# Altium PCB Test.PcbDoc
Units mm, origin at the board's own origin, x right, y up, seen from the top; angles counter-clockwise.
Board outline 45.21 x 46.61 mm, 2 copper layers (Top Layer, Bottom Layer); 35 components, 34 nets, 177 pads, 71 vias.
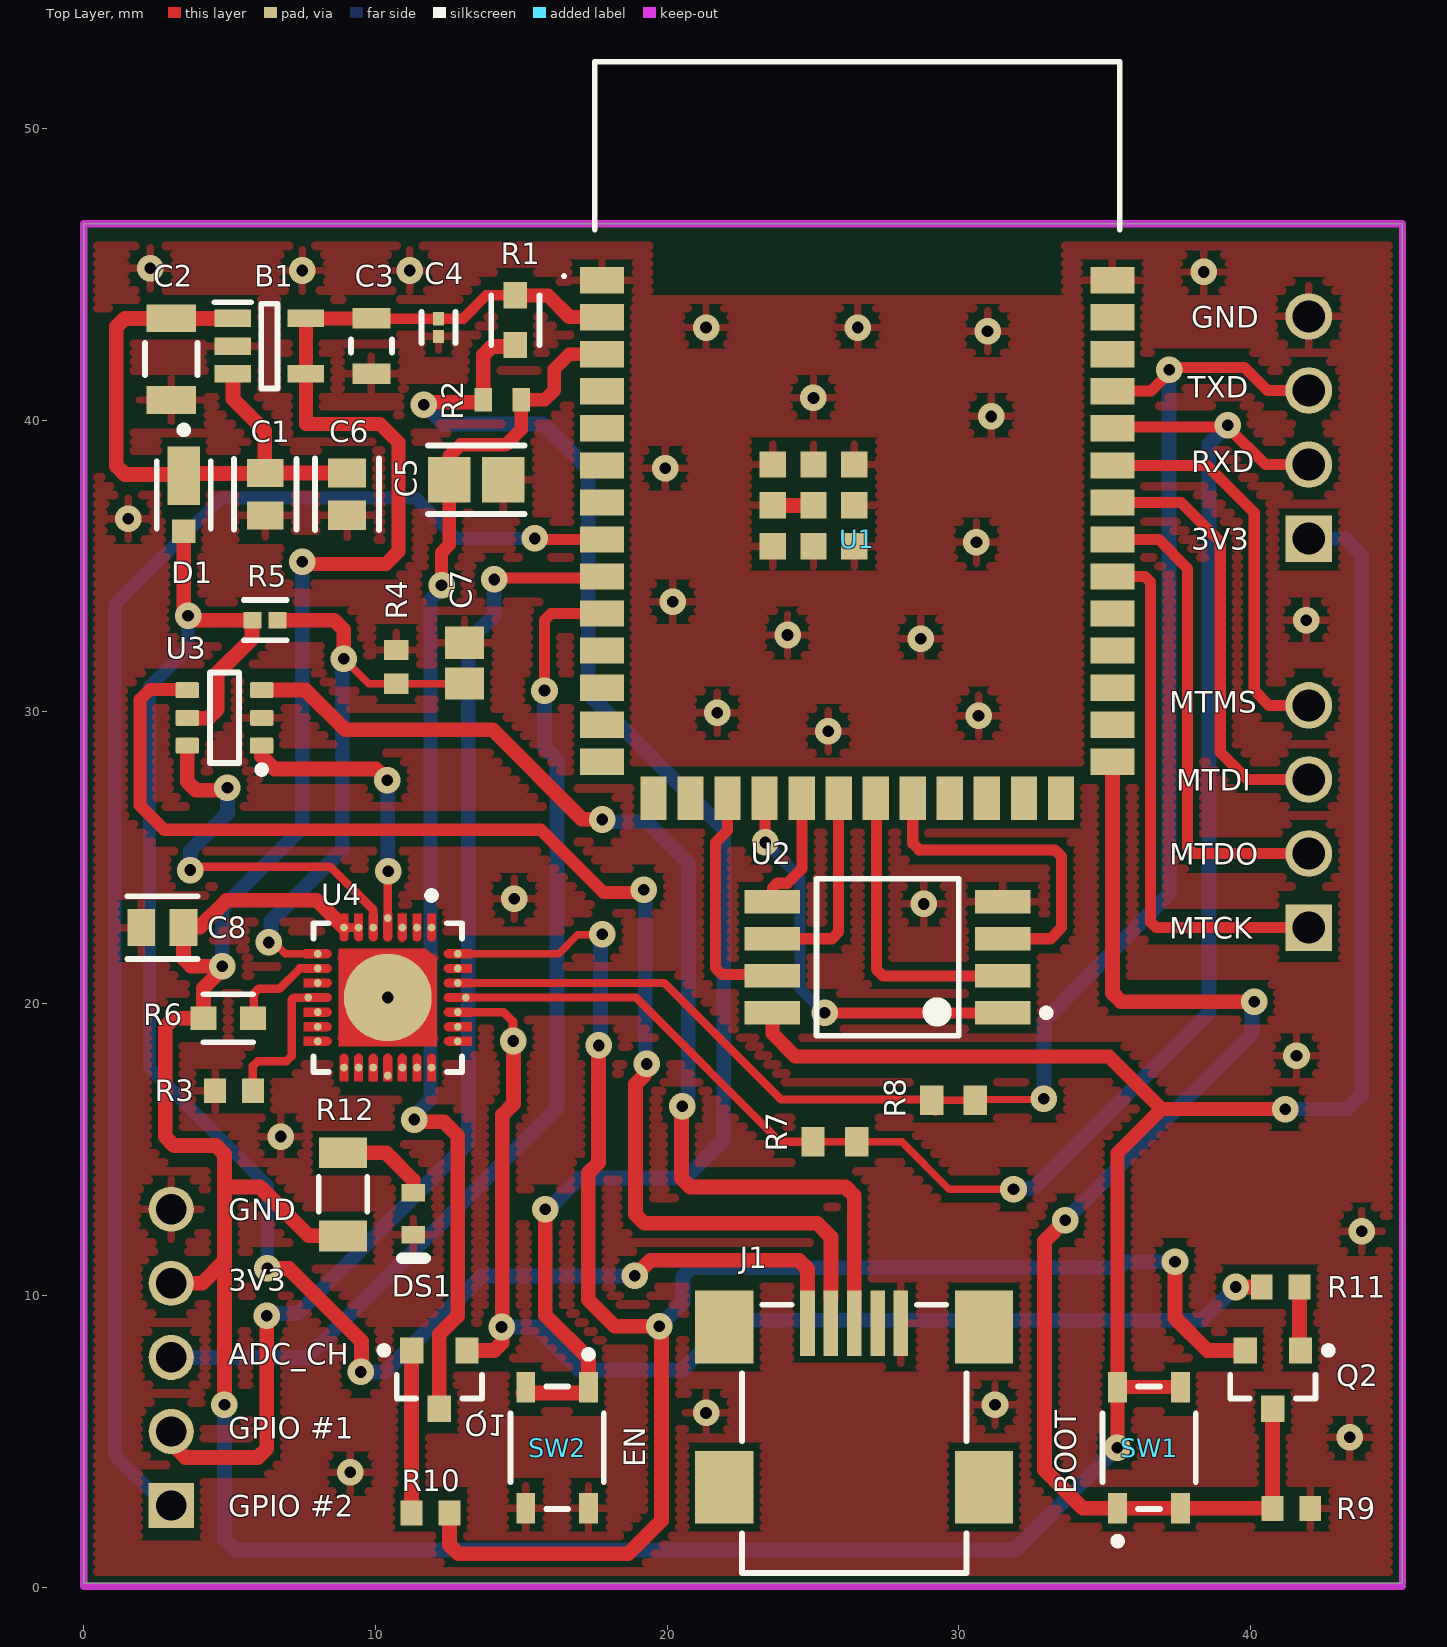
[diagram p0: Top Layer view]
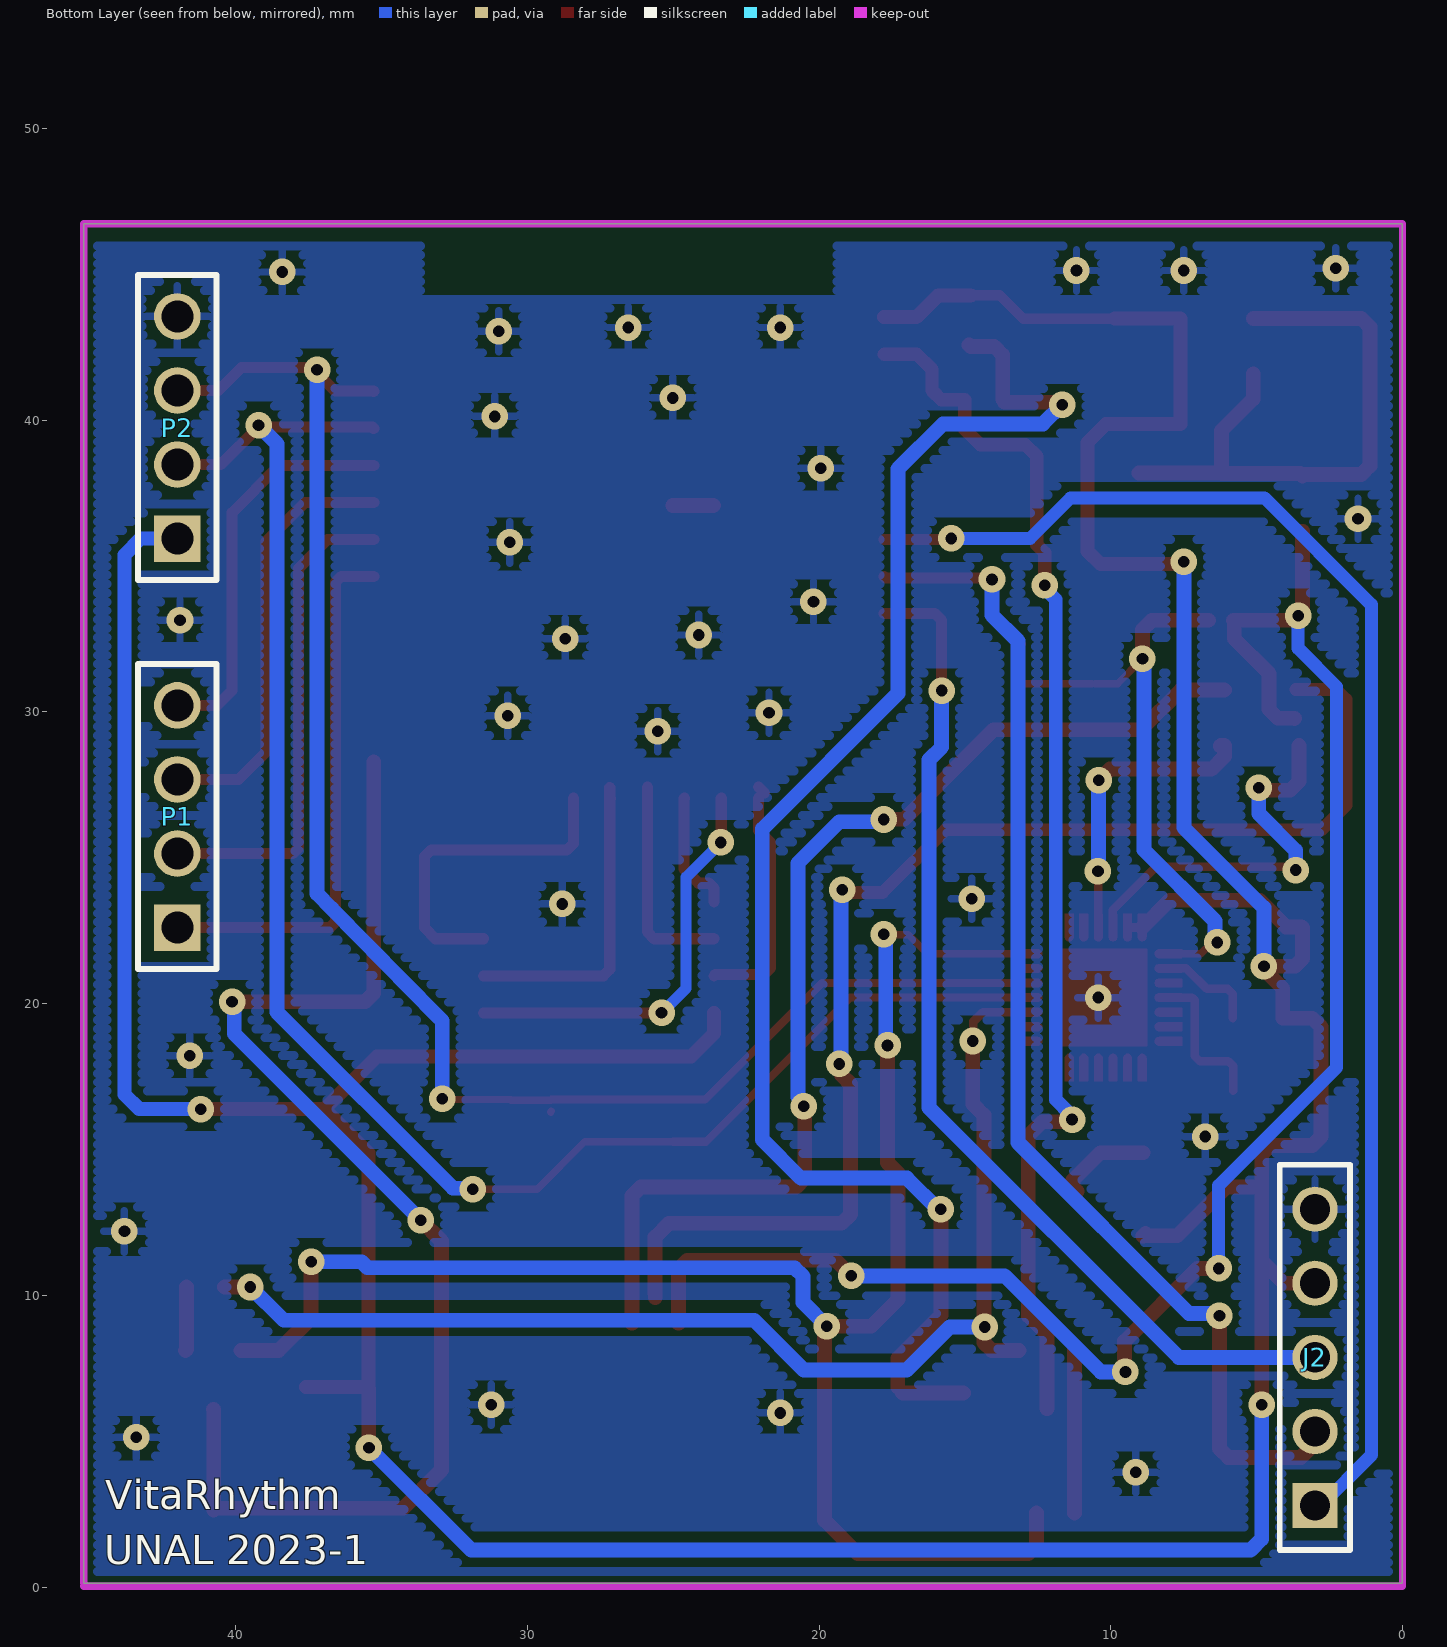
[diagram p1: Bottom Layer view, seen from below]
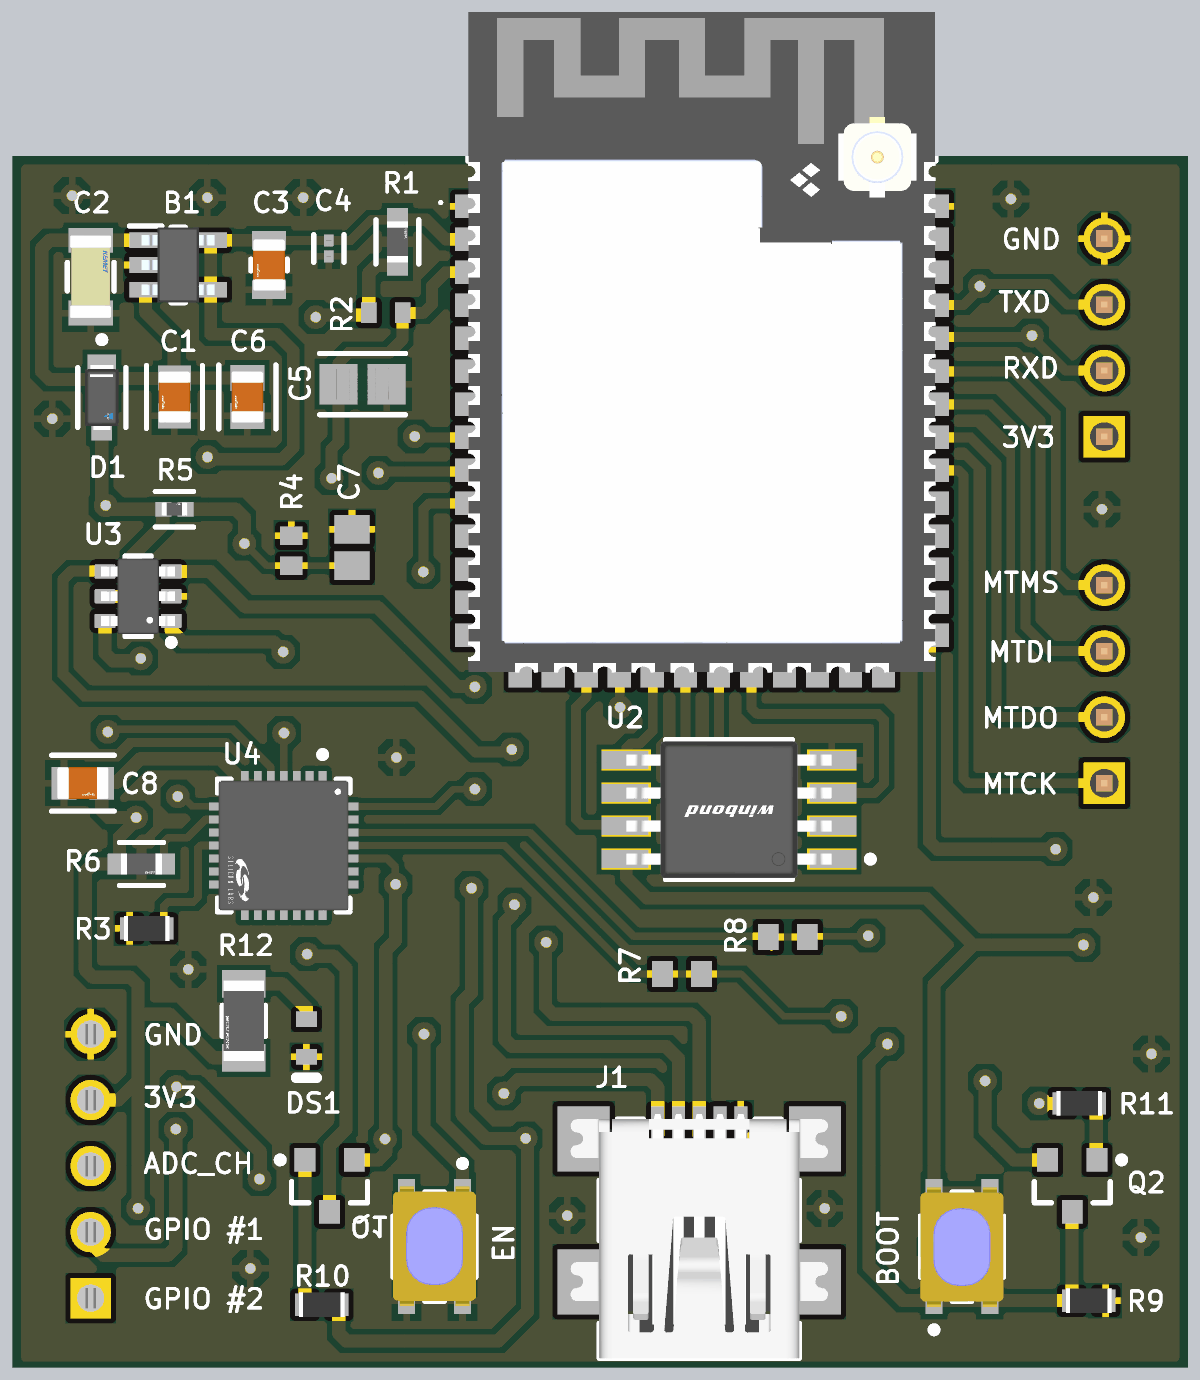
[diagram p2: 3D render of the assembled board from above, using the file's embedded part models]
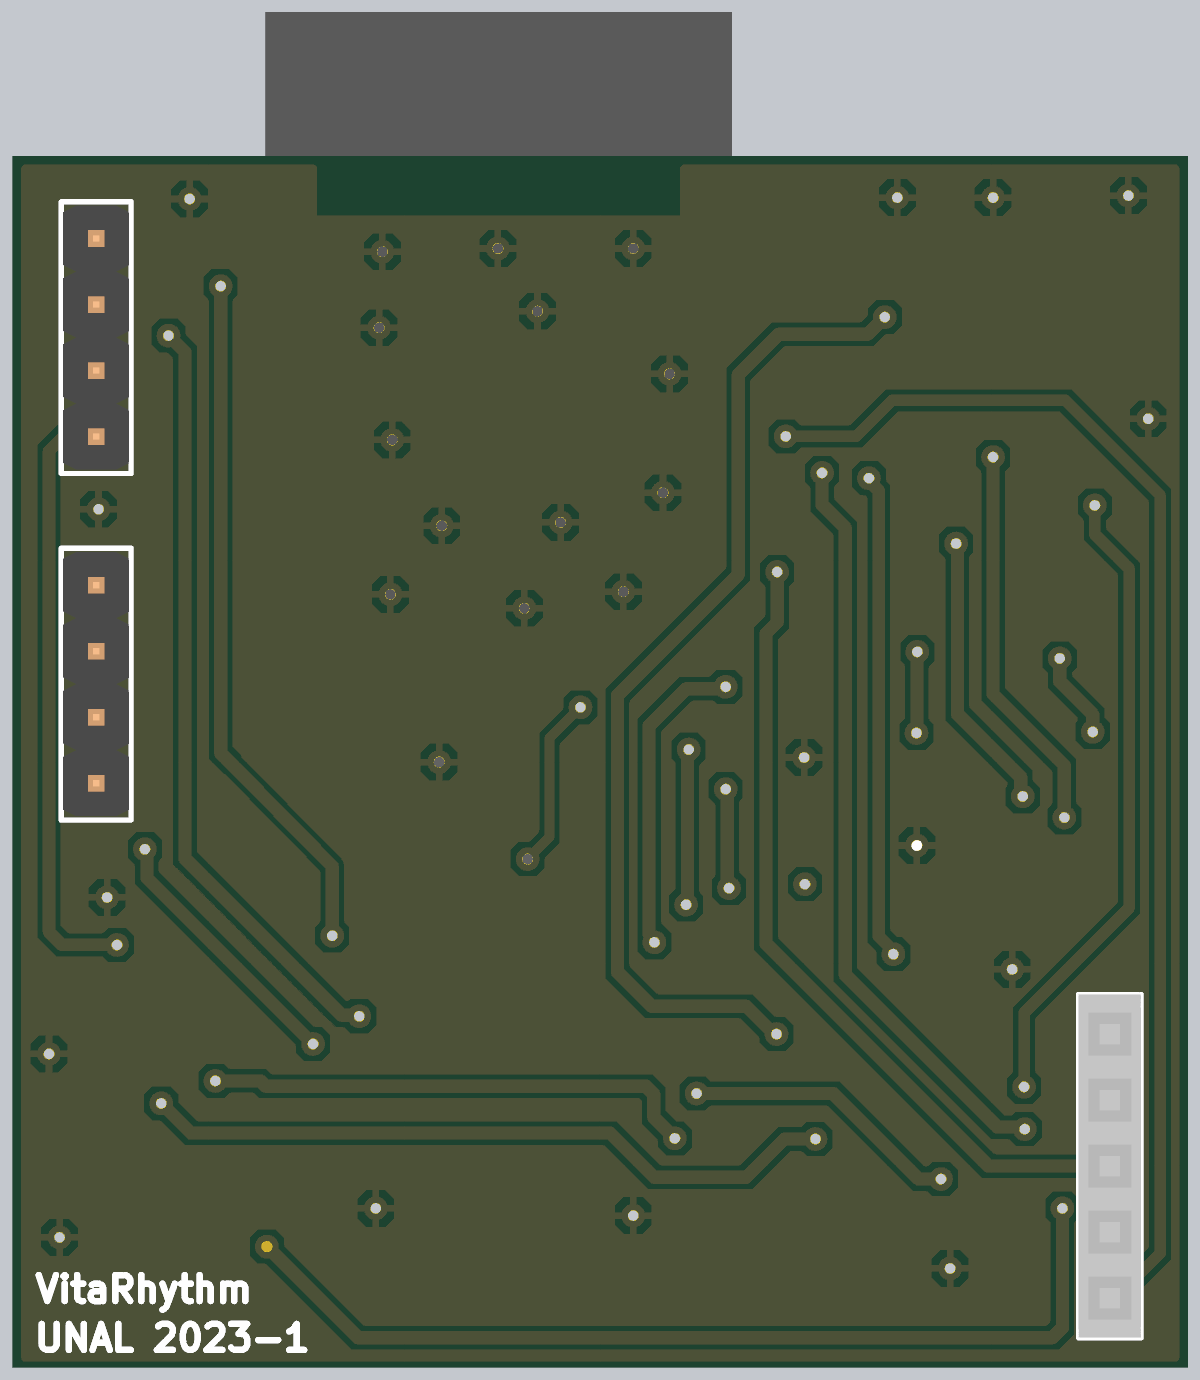
[diagram p3: 3D render of the assembled board from below, using the file's embedded part models]

## Layer stack, top to bottom
Top Solder: solder mask 0.0102, Solder Resist, Dk 3.5
Top Layer: signal copper 0.0356
Dielectric 1: dielectric 0.32, FR-4, Dk 4.8
Bottom Layer: signal copper 0.0356
Bottom Solder: solder mask 0.0102, Solder Resist, Dk 3.5

## Board outline
0,0.127 0,46.736 45.212,46.736 45.212,0.127

## Design rules (kind name [scope] priority, off if disabled: settings)
Clearance [All] p1: gap=0.2 ignorepadtopadclearanceinfootprint=FALSE except(0.114: Arc-Text Arc-Hole Track-Text SMDPad-SMDPad SMDPad-Text SMDPad-Hole THPad-Text THPad-Hole Via-Text Fill-Text Poly-Text Region-Text Text-Text Text-Hole)
HoleSize [All] p1: absolutevalues=TRUE maxlimit=3.81 minlimit=0.025 maxpercent=80.000 minpercent=20.000
MinimumSolderMaskSliver [All] p1: minsoldermaskwidth=0.05
PolygonConnect [All] p1: connectstyle=Relief reliefconductorwidth=0.254 reliefentries=4 polygonreliefangle="90 Angle" airgapwidth=0.254
RoomDefinition PRUEBA [InComponentClass('PRUEBA')] p1: confinementstyle=ConfineIn formatcopy=TRUE lockcomponents=FALSE outline 0,0.127 45.212,0.127 45.212,53.467 0,53.467
RoutingVias [All] p1: holewidth=0.305 width=0.508 viastyle="Through Hole" minholewidth=0.304 minwidth=0.508 maxholewidth=0.711 maxwidth=1.27
ShortCircuit [All] p1: allowed=TRUE
SilkToSolderMaskClearance [IsPad] p1: minsilkscreentomaskgap=0.075 clearancetoexposedcopper=TRUE
SolderMaskExpansion [All] p1: expansion=0.2 istentingtop=FALSE
Width [All] p1: maxlimit=0.762 minlimit=0.254 preferedwidth=0.254
26 further rules are at their usual default settings.

## Components (designator, comment, footprint, x,y, rotation, side; value= is the part's Value field where it differs from the comment)
B1 "ADP150AUJZ-3.3-R7" SOT95P280X100-5N 6.365,42.545 r0 top
C1 "GRM21BR61C106KE15L" FP-GRM21B-0_1-IPC_C 6.223,37.465 r270 top
C2 "C1206C104K1RACTU" FP-C1206C-EB-MFG 3,42.095 r270 top value="0.10 μF"
C3 "GRM21BR60J226ME39L" FP-GRM21B-0_15-MFG 9.865,42.545 r270 top
C4 "CL03A104KQ3NNNH" FP-CL03-IPC_B 12.165,43.18 r270 top
C5 "CL21B223KBANNNC" FP-CL21-IPC_A 13.462,37.96 r0 top
C6 "GRM21BR61E106KA73L" FP-GRM21B-0_15-IPC_C 9.03,37.466 r270 top
C7 "C0805C105K4PACTU" CAPC2013X145X50LL20T25 13.056,31.674 r270 top value=1uf
C8 "GRM21BR61C106KE15L" FP-GRM21B-0_1-IPC_C 2.7,22.606 r0 top
D1 "MSS1P4-M3/89A" FP-96591-MFG 3.429,37.445 r270 top value=50pF
DS1 "TLMS1100-GS08" VISH-TLMX1100_V 11.3,12.8 r270 top
J1 "651305142821" 651305142821 26.416,5.08 r0 top
J2 "SSW-105-01-G-S" SMTC-SSW-105-01-X-S 3,2.794 r90 bottom
P1 "61300411121" 61300411121 42,26.416 r90 bottom
P2 "61300411121" 61300411121 42,39.751 r90 bottom
Q1 "BC848CLT1G" ONSC-SOT-23-3-318-08_V#1 12.192,7.112 r270 top
Q2 "BC848CLT1G" ONSC-SOT-23-3-318-08_V#2 40.767,7.112 r270 top
R1 "AC0603FR-0720KL" FP-AC0603-MFG 14.8,43.434 r90 top
R2 "RC0603FR-072KL" RESC1608X55X25LL10T15 14.351,40.704 r180 top
R3 "ERJ3EKF1002V" RESC1609X55X30LL15T15 5.154,17.018 r0 top
R4 "CRCW060347K5FKEA" RESC1609X50X30LL10T20 10.719,31.549 r270 top value=47.5k
R5 "RC0402FR-0722K1L" FP-RC0402-0_4-IPC_B 6.223,33.147 r0 top
R6 "AC0603FR-071KL" FP-AC0603-MFG 4.954,19.5 r0 top
R7 "RC0603JR-070RL" RESC1608X55X25ML10T15 25.756,15.265 r0 top
R8 "RC0603JR-070RL" RESC1608X55X25ML10T15 29.82,16.688 r0 top
R9 "ERJ3EKF1002V" RESC1609X55X30LL15T15 41.402,2.692 r0 top
R10 "ERJ3EKF1002V" RESC1609X55X30LL15T15 11.892,2.54 r180 top
R11 "ERJ3EKF1002V" RESC1609X55X30LL15T15 41.036,10.287 r0 top
R12 "CR1206-FX-5101ELF" FP-CR1206-IPC_B 8.89,13.462 r270 top
SW1 "PTS810 SJG 250 SMTR LFS" FP-PTS810_SJG_250_SMTR_LF-MFG 36.523,4.775 r90 top
SW2 "PTS810 SJG 250 SMTR LFS" FP-PTS810_SJG_250_SMTR_LF-MFG 16.231,4.775 r270 top
U1 "ESP32-S2-SOLO-N4R2" ESP32S2SOLON4R2 26.519,39.544 r0 top
U2 "W25Q80DVSSIG" FP-SS-MFG 27.559,21.59 r180 top
U3 "TPD4S009DBVR" DBV0006A_L 4.826,29.8 r180 top
U4 "CP2102N-A02-GQFN28" FP-CP2102N-A02-GQFN28-MFG 10.425,20.209 r270 top

## Footprints (in the part's own frame and the unit in brackets; to place one, negate y for a bottom-side part, rotate by r counter-clockwise, add the part's x,y. Pads: shape width x height; smd on the part's side, far side on the other; paste and mask are expansions set on the pad)
61300411121 [mm] "Pin Header, pitch 2.54 mm, THT, Vertical, single row, 4p"
  rect 1.6x1.6 hole 1.1: 1(-3.81,0)
  round 1.6 hole 1.1: 2(-1.27,0) 3(1.27,0) 4(3.81,0)
  silkscreen extent -5.23,-1.35 5.23,1.35, body extent -5.08,-1.27 5.08,1.27, height 8.57
651305142821 [mm] "Mini USB 2.0 Type AB SMT Horizontal 5 Contacts"
  rect 0.5x2.25 smd: 1(-1.6,3.965) 2(-0.8,3.965) 3(0,3.965) 4(0.8,3.965) 5(1.6,3.965)
  rect 2x2.5 smd: Shell(-4.45,-1.66) Shell(-4.45,3.84) Shell(4.45,-1.66) Shell(4.45,3.84)
  silkscreen extent -3.85,-4.6 3.85,4.6, body extent -4.95,-4.6 4.95,4.8, height 4.1
CAPC2013X145X50LL20T25 [mm] "Chip Capacitor, 2-Leads, Body 2.00x1.25mm, IPC High Density"
  rect 1.1x1.35 smd: 1(-0.7,0) 2(0.7,0)
  body extent -1.1,-0.72 1.1,0.72, height 1.45
DBV0006A_L [mm] "SOT23, 6-Leads, Body 3.05x1.75mm, Pitch 0.95mm, IPC High Density"
  rrect18% 0.8x0.55 smd: 1(-1.275,0.95) 2(-1.275,0) 3(-1.275,-0.95) 4(1.275,-0.95) 5(1.275,0) 6(1.275,0.95)
  silkscreen extent -1.4,-1.55 0.5,1.9, body extent -1.42,-1.46 1.42,1.46, height 1.11
ESP32S2SOLON4R2 [mm]
  rect 1.5x0.9 smd: 1(-8.75,5.26) 2(-8.75,3.99) 3(-8.75,2.72) 4(-8.75,1.45) 5(-8.75,0.18) 6(-8.75,-1.09) 7(-8.75,-2.36) 8(-8.75,-3.63) 9(-8.75,-4.9) 10(-8.75,-6.17) 11(-8.75,-7.44) 12(-8.75,-8.71) 13(-8.75,-9.98) 14(-8.75,-11.25) 27(8.75,-11.25) 28(8.75,-9.98) 29(8.75,-8.71) 30(8.75,-7.44) 31(8.75,-6.17) 32(8.75,-4.9) 33(8.75,-3.63) 34(8.75,-2.36) 35(8.75,-1.09) 36(8.75,0.18) 37(8.75,1.45) 38(8.75,2.72) 39(8.75,3.99) 40(8.75,5.26)
  rect 0.9x1.5 smd: 15(-6.985,-12.5) 16(-5.715,-12.5) 17(-4.445,-12.5) 18(-3.175,-12.5) 19(-1.905,-12.5) 20(-0.635,-12.5) 21(0.635,-12.5) 22(1.905,-12.5) 23(3.175,-12.5) 24(4.445,-12.5) 25(5.715,-12.5) 26(6.985,-12.5)
  rect 0.9x0.9 smd: 41(-1.5,-2.46) 42(-1.5,-1.06) 43(-2.9,-1.06) 44(-2.9,-2.46) 45(-2.9,-3.86) 46(-1.5,-3.86) 47(-0.1,-3.86) 48(-0.1,-2.46) 49(-0.1,-1.06)
  silkscreen extent -10.1,5.35 9,12.75, body extent -9,-12.68 8.99,12.74, height 2.65
FP-96591-MFG [mm]
  rect 2x1.1 smd paste+0 mask+0: 1(-0.65,0)
  rect 0.8x0.8 smd paste+0 mask+0: 2(1.25,0)
  silkscreen extent -2.35,-0.92 1.15,0.92, body extent -1.75,-0.8 1.75,0.8, height 0.25
FP-AC0603-MFG [mm]
  rect 0.9x0.8 smd paste+0 mask+0: 1(-0.85,0) 2(0.85,0)
  silkscreen extent -0.85,-0.82 0.85,0.82, body extent -1.4,-0.55 1.4,0.55, height 0.25
FP-C1206C-EB-MFG [mm]
  rect 0.95x1.7 smd paste+0 mask+0: 1(-1.4,0) 2(1.4,0)
  silkscreen extent -0.55,-0.9 0.55,0.9, body extent -2,-1 2,1, height 0.25
FP-CL03-IPC_B [mm]
  rect 0.454x0.363 smd paste+0 mask+0: 1(-0.304,0) 2(0.304,0)
  silkscreen extent -0.53,-0.58 0.53,0.58, body extent -0.68,-0.33 0.68,0.33, height 0.25
FP-CL21-IPC_A [mm]
  rect 1.455x1.556 smd paste+0 mask+0: 1(-0.926,0) 2(0.926,0)
  silkscreen extent -1.65,-1.18 1.65,1.18, body extent -2.15,-1.28 2.15,1.28, height 0.25
FP-CP2102N-A02-GQFN28-MFG [mm]
  round 0.27 smd paste+0 mask+0: 1(-2.4,1.5) 2(-2.4,1) 3(-2.4,0.5) 4(-2.725,0) 5(-2.4,-0.5) 6(-2.4,-1) 7(-2.4,-1.5) 8(-1.5,-2.4) 9(-1,-2.4) 10(-0.5,-2.4) 11(0,-2.725) 12(0.5,-2.4) 13(1,-2.4) 14(1.5,-2.4) 15(2.4,-1.5) 16(2.4,-1) 17(2.4,-0.5) 18(2.675,0) 19(2.4,0.5) 20(2.4,1) 21(2.4,1.5) 22(1.5,2.4) 23(1,2.4) 24(0.5,2.4) 25(0,2.675) 26(-0.5,2.4) 27(-1,2.4) 28(-1.5,2.4)
  round 3.015 smd paste-1000 mask+0: 29(0,0)
  Top Layer region: -2.875,1.65 -2.075,1.65 -2.018,1.639 -1.969,1.606 -1.936,1.557 -1.925,1.5 -1.925,1.5 -1.936,1.443 -1.969,1.394 -2.018,1.361 -2.075,1.35 -2.075,1.35 -2.875,1.35
  Top Layer region: -2.875,1.15 -2.075,1.15 -2.018,1.139 -1.969,1.106 -1.936,1.057 -1.925,1 -1.925,1 -1.936,0.943 -1.969,0.894 -2.018,0.861 -2.075,0.85 -2.075,0.85 -2.875,0.85
  Top Layer region: -2.875,0.65 -2.075,0.65 -2.018,0.639 -1.969,0.606 -1.936,0.557 -1.925,0.5 -1.925,0.5 -1.936,0.443 -1.969,0.394 -2.018,0.361 -2.075,0.35 -2.075,0.35 -2.875,0.35
  Top Layer region: -2.875,0.15 -2.075,0.15 -2.018,0.139 -1.969,0.106 -1.936,0.057 -1.925,0 -1.925,0 -1.936,-0.057 -1.969,-0.106 -2.018,-0.139 -2.075,-0.15 -2.075,-0.15 -2.875,-0.15
  Top Layer region: -2.875,-0.35 -2.075,-0.35 -2.018,-0.361 -1.969,-0.394 -1.936,-0.443 -1.925,-0.5 -1.925,-0.5 -1.936,-0.557 -1.969,-0.606 -2.018,-0.639 -2.075,-0.65 -2.075,-0.65 -2.875,-0.65
  Top Layer region: -2.875,-0.85 -2.075,-0.85 -2.018,-0.861 -1.969,-0.894 -1.936,-0.943 -1.925,-1 -1.925,-1 -1.936,-1.057 -1.969,-1.106 -2.018,-1.139 -2.075,-1.15 -2.075,-1.15 -2.875,-1.15
  Top Layer region: -2.875,-1.35 -2.075,-1.35 -2.018,-1.361 -1.969,-1.394 -1.936,-1.443 -1.925,-1.5 -1.925,-1.5 -1.936,-1.557 -1.969,-1.606 -2.018,-1.639 -2.075,-1.65 -2.075,-1.65 -2.875,-1.65
  Top Layer region: 2.875,-1.65 2.075,-1.65 2.018,-1.639 1.969,-1.606 1.936,-1.557 1.925,-1.5 1.925,-1.5 1.936,-1.443 1.969,-1.394 2.018,-1.361 2.075,-1.35 2.075,-1.35 2.875,-1.35
  Top Layer region: 2.875,-1.15 2.075,-1.15 2.018,-1.139 1.969,-1.106 1.936,-1.057 1.925,-1 1.925,-1 1.936,-0.943 1.969,-0.894 2.018,-0.861 2.075,-0.85 2.075,-0.85 2.875,-0.85
  Top Layer region: 2.875,-0.65 2.075,-0.65 2.018,-0.639 1.969,-0.606 1.936,-0.557 1.925,-0.5 1.925,-0.5 1.936,-0.443 1.969,-0.394 2.018,-0.361 2.075,-0.35 2.075,-0.35 2.875,-0.35
  Top Layer region: 2.875,-0.15 2.075,-0.15 2.018,-0.139 1.969,-0.106 1.936,-0.057 1.925,0 1.925,0 1.936,0.057 1.969,0.106 2.018,0.139 2.075,0.15 2.075,0.15 2.875,0.15
  Top Layer region: 2.875,0.35 2.075,0.35 2.018,0.361 1.969,0.394 1.936,0.443 1.925,0.5 1.925,0.5 1.936,0.557 1.969,0.606 2.018,0.639 2.075,0.65 2.075,0.65 2.875,0.65
  Top Layer region: 2.875,0.85 2.075,0.85 2.018,0.861 1.969,0.894 1.936,0.943 1.925,1 1.925,1 1.936,1.057 1.969,1.106 2.018,1.139 2.075,1.15 2.075,1.15 2.875,1.15
  Top Layer region: 2.875,1.35 2.075,1.35 2.018,1.361 1.969,1.394 1.936,1.443 1.925,1.5 1.925,1.5 1.936,1.557 1.969,1.606 2.018,1.639 2.075,1.65 2.075,1.65 2.875,1.65
  Top Layer region: -1.65,-2.875 -1.65,-2.075 -1.639,-2.018 -1.606,-1.969 -1.557,-1.936 -1.5,-1.925 -1.5,-1.925 -1.443,-1.936 -1.394,-1.969 -1.361,-2.018 -1.35,-2.075 -1.35,-2.075 -1.35,-2.875
  Top Layer region: -1.15,-2.875 -1.15,-2.075 -1.139,-2.018 -1.106,-1.969 -1.057,-1.936 -1,-1.925 -1,-1.925 -0.943,-1.936 -0.894,-1.969 -0.861,-2.018 -0.85,-2.075 -0.85,-2.075 -0.85,-2.875
  Top Layer region: -0.65,-2.875 -0.65,-2.075 -0.639,-2.018 -0.606,-1.969 -0.557,-1.936 -0.5,-1.925 -0.5,-1.925 -0.443,-1.936 -0.394,-1.969 -0.361,-2.018 -0.35,-2.075 -0.35,-2.075 -0.35,-2.875
  Top Layer region: -0.15,-2.875 -0.15,-2.075 -0.139,-2.018 -0.106,-1.969 -0.057,-1.936 0,-1.925 0,-1.925 0.057,-1.936 0.106,-1.969 0.139,-2.018 0.15,-2.075 0.15,-2.075 0.15,-2.875
  Top Layer region: 0.35,-2.875 0.35,-2.075 0.361,-2.018 0.394,-1.969 0.443,-1.936 0.5,-1.925 0.5,-1.925 0.557,-1.936 0.606,-1.969 0.639,-2.018 0.65,-2.075 0.65,-2.075 0.65,-2.875
  Top Layer region: 0.85,-2.875 0.85,-2.075 0.861,-2.018 0.894,-1.969 0.943,-1.936 1,-1.925 1,-1.925 1.057,-1.936 1.106,-1.969 1.139,-2.018 1.15,-2.075 1.15,-2.075 1.15,-2.875
  Top Layer region: 1.35,-2.875 1.35,-2.075 1.361,-2.018 1.394,-1.969 1.443,-1.936 1.5,-1.925 1.5,-1.925 1.557,-1.936 1.606,-1.969 1.639,-2.018 1.65,-2.075 1.65,-2.075 1.65,-2.875
  Top Layer region: 1.65,2.875 1.65,2.075 1.639,2.018 1.606,1.969 1.557,1.936 1.5,1.925 1.5,1.925 1.443,1.936 1.394,1.969 1.361,2.018 1.35,2.075 1.35,2.075 1.35,2.875
  Top Layer region: 1.15,2.875 1.15,2.075 1.139,2.018 1.106,1.969 1.057,1.936 1,1.925 1,1.925 0.943,1.936 0.894,1.969 0.861,2.018 0.85,2.075 0.85,2.075 0.85,2.875
  Top Layer region: 0.65,2.875 0.65,2.075 0.639,2.018 0.606,1.969 0.557,1.936 0.5,1.925 0.5,1.925 0.443,1.936 0.394,1.969 0.361,2.018 0.35,2.075 0.35,2.075 0.35,2.875
  Top Layer region: 0.15,2.875 0.15,2.075 0.139,2.018 0.106,1.969 0.057,1.936 0,1.925 0,1.925 -0.057,1.936 -0.106,1.969 -0.139,2.018 -0.15,2.075 -0.15,2.075 -0.15,2.875
  Top Layer region: -0.35,2.875 -0.35,2.075 -0.361,2.018 -0.394,1.969 -0.443,1.936 -0.5,1.925 -0.5,1.925 -0.557,1.936 -0.606,1.969 -0.639,2.018 -0.65,2.075 -0.65,2.075 -0.65,2.875
  Top Layer region: -0.85,2.875 -0.85,2.075 -0.861,2.018 -0.894,1.969 -0.943,1.936 -1,1.925 -1,1.925 -1.057,1.936 -1.106,1.969 -1.139,2.018 -1.15,2.075 -1.15,2.075 -1.15,2.875
  Top Layer region: -1.35,2.875 -1.35,2.075 -1.361,2.018 -1.394,1.969 -1.443,1.936 -1.5,1.925 -1.5,1.925 -1.557,1.936 -1.606,1.969 -1.639,2.018 -1.65,2.075 -1.65,2.075 -1.65,2.875
  Top Layer region: -1.675,1.325 -1.325,1.675 1.675,1.675 1.675,-1.675 -1.675,-1.675 -1.675,1.325
  silkscreen extent -3.62,-2.55 2.55,2.55, body extent -2.98,-2.98 2.98,2.98, height 0.25
FP-CR1206-IPC_B [mm]
  rect 1.058x1.662 smd paste+0 mask+0: 1(-1.427,0) 2(1.427,0)
  silkscreen extent -0.6,-0.83 0.6,0.83, body extent -2.21,-1.08 2.21,1.08, height 0.25
FP-GRM21B-0_1-IPC_C [mm]
  rect 0.958x1.262 smd paste+0 mask+0: 1(-0.727,0) 2(0.727,0)
  silkscreen extent -1.21,-1.07 1.21,1.07, body extent -1.31,-0.77 1.31,0.77, height 0.25
FP-GRM21B-0_15-IPC_C [mm]
  rect 1.006x1.308 smd paste+0 mask+0: 1(-0.726,0) 2(0.726,0)
  silkscreen extent -1.23,-1.1 1.23,1.1, body extent -1.33,-0.8 1.33,0.8, height 0.25
FP-GRM21B-0_15-MFG [mm]
  rect 0.7x1.3 smd paste+0 mask+0: 1(-0.95,0) 2(0.95,0)
  silkscreen extent -0.23,-0.7 0.23,0.7, body extent -1.4,-0.8 1.4,0.8, height 0.25
FP-PTS810_SJG_250_SMTR_LF-MFG [mm]
  rect 1.05x0.65 smd paste+0 mask+0: 1(-2.075,1.075) 2(2.075,1.075) 3(-2.075,-1.075) 4(2.075,-1.075)
  silkscreen extent -3.32,-1.6 2.1,1.6, body extent -2.7,-1.7 2.7,1.7, height 0.25
FP-RC0402-0_4-IPC_B [mm]
  rect 0.615x0.572 smd paste+0 mask+0: 1(-0.429,0) 2(0.429,0)
  silkscreen extent -0.74,-0.69 0.74,0.69, body extent -0.89,-0.44 0.89,0.44, height 0.25
FP-SS-MFG [mm]
  rect 1.9x0.8 smd paste-1000 mask+0: 1(-3.95,1.905) 2(-3.95,0.635) 3(-3.95,-0.635) 4(-3.95,-1.905) 5(3.95,-1.905) 6(3.95,-0.635) 7(3.95,0.635) 8(3.95,1.905)
  silkscreen extent -5.57,-2.69 2.44,2.69, body extent -5,-2.79 5,2.79, height 0.25
ONSC-SOT-23-3-318-08_V#1 [mm] "SOT23, 3-Leads, Body 2.92x1.3mm, Pitch 0.95mm"
  rect 0.9x0.8 smd: 1(-1,-0.95) 2(-1,0.95) 3(1,0)
  silkscreen extent -1.12,-2.02 0.65,1.46, body extent -0.65,-1.46 0.65,1.46, height 1.11
ONSC-SOT-23-3-318-08_V#2 [mm] "SOT23, 3-Leads, Body 2.92x1.3mm, Pitch 0.95mm"
  rect 0.9x0.8 smd: 1(-1,0.95) 2(-1,-0.95) 3(1,0)
  silkscreen extent -1.12,-1.46 0.65,2.03, body extent -0.65,-1.46 0.65,1.46, height 1.11
RESC1608X55X25LL10T15 [mm] "Chip Resistor, 2-Leads, Body 1.60x0.80mm, IPC High Density"
  rect 0.6x0.8 smd: 1(-0.65,0) 2(0.65,0)
  body extent -0.85,-0.45 0.85,0.45, height 0.55
RESC1608X55X25ML10T15 [mm] "Chip Resistor, 2-Leads, Body 1.60x0.80mm, IPC Low Density"
  rect 0.8x1 smd: 1(-0.75,0) 2(0.75,0)
  body extent -0.85,-0.45 0.85,0.45, height 0.55
RESC1609X50X30LL10T20 [mm] "Chip Resistor, 2-Leads, Body 1.55x0.85mm, IPC High Density"
  rect 0.7x0.85 smd: 1(-0.575,0) 2(0.575,0)
  body extent -0.82,-0.48 0.82,0.48, height 0.5
RESC1609X55X30LL15T15 [mm] "Chip Resistor, 2-Leads, Body 1.75x0.95mm, IPC High Density"
  rect 0.75x0.85 smd: 1(-0.65,0) 2(0.65,0)
  body extent -0.87,-0.48 0.87,0.48, height 0.55
SMTC-SSW-105-01-X-S [mm] "SQ Post Socket, 1x5 Pins, Vertical, 2.54mm Pitch, Female"
  rect 1.55x1.55 hole 1.04: 1(0,0)
  round 1.55 hole 1.04: 2(2.54,0) 3(5.08,0) 4(7.62,0) 5(10.16,0)
  silkscreen extent -1.53,-1.2 11.69,1.2, body extent -1.52,-1.21 11.68,1.21, height 8.51
SOT95P280X100-5N [mm]
  rect 1.25x0.6 smd: 1(-1.25,0.95) 2(-1.25,0) 3(-1.25,-0.95) 4(1.25,-0.95) 5(1.25,0.95)
  silkscreen extent -1.88,-1.45 0.28,1.5, body extent -1.4,-1.45 1.4,1.45, height 1
VISH-TLMX1100_V [mm] "SMD, 2-Leads, Body 1.6x0.8mm"
  rect 0.6x0.8 smd: 1(-0.725,0) 2(0.725,0)
  silkscreen extent 1.53,-0.4 1.53,0.4, body extent -0.8,-0.4 0.8,0.4, height 0.65

## Part data
B1: "Ultralow Noise, 150 mA CMOS Linear Regulator", Manufacturer_Name="Analog Devices", Mouser Part Number=N/A, Datasheet Link=https://componentsearchengine.com/Datasheets/1/ADP150AUJZ-3.3-R7.pdf, Geometry.Height=1mm, Manufacturer_Part_Number=ADP150AUJZ-3.3-R7, Mouser Price/Stock=https://www.mouser.com/Search/Refine.aspx?Keyword=N%2FA
C1 C8: library part CMP-2007-03453-2, "Chip Multilayer Ceramic Capacitors for General Purpose, 0805, 10uF, X5R, 15%, 10%, 16V", Capacitance=10uF, Case Code (Imperial)=0805, Case Code (Metric)=2012, Dielectric=X5R, Max Operating Temperature=85°C, Min Operating Temperature=-55°C, Package Quantity=1, Tolerance=10%, Voltage=16V, Case/Package=0805, Depth=1.25mm, Height=1.25mm, Lead Free="Lead Free", Length=2mm, Material=Ceramic, Mount="Surface Mount", Packaging="Tape and Reel", Radiation Hardening=No, REACH SVHC="No SVHC", Termination=SMD/SMT, Thickness=0.053inch, Voltage Rating=16V, Voltage Rating (DC)=16V, Width=1.25mm
C2: library part CMP-03020-000153-1, "CAP CER 0.1UF 100V X7R 1206", Capacitance="0.10 μF", Manufacturer=KEMET, Package=C1206C-EB, Temperature="-55°C to +150°C", Temperature Characteristic=X7R, Temperature Coefficient=15%, Temperature Range High=+150°C, Temperature Range Low=-55°C, Tolerance=0.1, Voltage Rating="100 V", Automotive=Yes, Automotive Grade="Grade 0", Category=Cap, ComponentLink2Description=Datasheet, ComponentLink2URL=https://content.kemet.com/datasheets/KEM_C1007_X8R_ULTRA_150C_SMD.pdf, Device Class L1="Passive Components", Device Class L2=Capacitors, Device Class L3="Ceramic Capacitors", Digikey Description="CAP CER 0.1UF 100V X7R 1206", Height=0.88mm, Ipc Land Pattern Name=CAPC320160X78, Lead Free=Yes, Manufacturer Part Number=C1206C104K1RACTU, Material=Ceramic, Mouser Description="CAP CER 0.1UF 100V X7R 1206", Octopart=https://octopart.com/c1206c104k1ractu-kemet-89521, RoHS=TRUE
C3: library part CMP-2007-03385-2, "Chip Multilayer Ceramic Capacitors for General Purpose, 0805, 22uF, X5R, 15%, 20%, 6.3V", Capacitance=22uF, Case Code (Imperial)=0805, Case Code (Metric)=2012, Dielectric=X5R, Max Operating Temperature=85°C, Min Operating Temperature=-55°C, Package Quantity=1, Tolerance=20%, Voltage=6.3V, Case/Package=0805, Depth=1.25mm, Height=1.25mm, Lead Free="Lead Free", Length=2mm, Material=Ceramic, Mount="Surface Mount", Packaging="Tape and Reel", Radiation Hardening=No, REACH SVHC="No SVHC", Termination=SMD/SMT, Thickness=0.053inch, Voltage Rating=6.3V, Voltage Rating (DC)=6.3V, Width=0.049inch
C4: library part CMP-13271-001518-1, "Cap Ceramic 100nF 6.3V X5R ±10% Pad SMD 0201 +85°C T/R", Capacitance=100nF, Case Code (Imperial)=0201, Case Code (Metric)=0603, Dielectric=X5R, Max Operating Temperature=85°C, Min Operating Temperature=-55°C, Package Quantity=15000, Tolerance=10%, Voltage Rating=6.3V, Case/Package=0201, Depth=0.3mm, Height=0.3mm, Length=0.6mm, Mount="Surface Mount", Packaging="Tape and Reel", Radiation Hardening=No, Thickness=0.013inch, Width=0.012inch
C5: library part CMP-13271-002911-1, "CL21 Series 0805 22nF 50V ±10% Tolerance X7R Multilayer Ceramic Chip Capacitor", Capacitance=22nF, Case Code (Imperial)=0805, Case Code (Metric)=2012, Dielectric=X7R, Max Operating Temperature=125°C, Min Operating Temperature=-55°C, Package Quantity=1, Tolerance=10%, Voltage=50V, Case/Package=0805, Contact Plating=Tin, Depth=1.25mm, Height=0.65mm, Lead Free="Lead Free", Length=2mm, Material=Ceramic, Mount="Surface Mount", Packaging="Tape and Reel", Radiation Hardening=No, Thickness=0.03inch, Voltage Rating=50V, Voltage Rating (DC)=50V, Width=0.049inch
C6: library part CMP-2007-03541-2, "Chip Multilayer Ceramic Capacitors for General Purpose, 0805, 10uF, X5R, 15%, 10%, 25V", Capacitance=10uF, Case Code (Imperial)=0805, Case Code (Metric)=2012, Dielectric=X5R, Max Operating Temperature=85°C, Min Operating Temperature=-55°C, Package Quantity=1, Tolerance=10%, Voltage=25V, Case/Package=0805, Depth=1.25mm, Height=1.25mm, Lead Free="Lead Free", Length=2mm, Material=Ceramic, Mount="Surface Mount", Packaging="Tape and Reel", Radiation Hardening=No, Termination=SMD/SMT, Thickness=0.053inch, Voltage Rating=25V, Voltage Rating (DC)=25V, Width=0.049inch
C7: library part CMP-1036-04746-2, Manufacturer=Kemet, Part Number=C0805C105K4PACTU
D1: library part CMP-02539-000019-1, "DIODE SCHOTTKY 40V 1A MICROSMP", Capacitance=50pF, Forward Current=1A, Manufacturer=Vishay, Max Junction Temp=+150°C, Max Repetitive Reverse Voltage=40V, Max Surge Forward Current=25A, Package=96591, Peak Reverse Current=8.5uA, Temperature="-55°C to +150°C", Temperature Range Low=-55°C, Automotive=No, Category=Diode, ComponentLink2Description=Datasheet, ComponentLink2URL=http://www.vishay.com/docs/89019/mss1p4.pdf, Device Class L1="Discrete Semiconductors", Device Class L2=Diodes, Device Class L3="Schottky Diodes", Digikey Description="DIODE SCHOTTKY 40V 1A MICROSMP", Footprint Url=http://www.vishay.com/docs/96591/microsmp_do-219ad_fredpt.pdf, Height=0.73mm, Lead Free=Yes, Manufacturer Part Number=MSS1P4-M3/89A, Mouser Description="Schottky Diodes & Rectifiers 1.0 Amp 40 Volt", Octopart=https://octopart.com/mss1p4-m3%2F89a-vishay-42505723, RoHS=TRUE, Temperature Range High=+150°C
DS1: library part CMP-1666-00027-1, "LED, RED, 2.1 V, -40 to 100 degC, 2-Pin SMD (0603), RoHS, Tape and Reel", Capacitance="12 pF", Case Code (Imperial)=0603, Case Code (Metric)=1608, Max Operating Temperature=125degC, Min Operating Temperature=-55degC, Package Quantity=4000, Resistance="100000000000 Ohm", Tolerance=5%, Type (Capacitors)=C0G, Voltage Rating="50 V", Case/Package=0603, ComponentLink1Description="Manufacturer URL", ComponentLink1URL=http://www.vishay.com/, ComponentLink2Description=Datasheet, ComponentLink2URL=http://www.vishay.com/docs/83173/tlmb1100.pdf, DatasheetVersion="Rev. 2.7, 03/2016", Height="0.8 mm", Length="1.6 mm", Mount="Surface Mount", PackageDescription="2-Pin Surface Mount Device, Body 1.6 x 0.8 mm", PackageReference=TLMX1100, Packaging="Tape and Reel", Pins=2, Radiation Hardening=No, REACH SVHC="No SVHC", RoHSCompliant=True, Voltage Rating (DC)="50 V", Width="0.8 mm"
J1: library part CMP-1502-03247-1, "Mini USB 2.0 Type AB Receptacle WR-COM, Horizontal, SMT, with Pads", Contact Resistance=20mOhm, Manufacturer="Wurth Elektronik", Operating Temperature=-40to105degC, Rated Current=1A, Working Voltage=30VAC, Connector Type=MiniUSB2.0TypeAB, Datasheet URL=https://katalog.we-online.de/em/datasheet/651305142821.pdf, Gender=Receptacle, Manufacturer URL=http://www.we-online.de, Mounting Technology=SMT, Orientation=Horizontal, Package Reference=651305142821, Packaging=TapeandReel, Part Number=651305142821, Publisher=WurthElektronik
J2: library part CMP-1023-00344-1, "SQ Post Socket, Through-hole, Vertical, -55 to 125 degC, 2.54mm Pitch, 5-Pin, Female, RoHS", Manufacturer=Samtec, Temperature Range="-55 to 125 degC", ComponentLink1Description="Manufacturer URL", ComponentLink1URL=http://www.samtec.com, ComponentLink2Description=Datasheet, ComponentLink2URL=http://www.samtec.com/documents/webfiles/pdf/SSW_TH.PDF, ComponentLink3Description="Package Specification", ComponentLink3URL=http://www.samtec.com/documents/webfiles/cpdf/SSW-1XX-XX-XXX-X-XX-XXX-XX-MKT.pdf, DatasheetVersion=F-214, Mounting Technology=Through-hole, Orientation=Vertical, PackageDescription="Assembly, Socket Strip .016 X .031 Tail", PackageReference=SSW-105-01-X-S, PackageVersion="CA, 6/1987", PartNumber=SSW-105-01-G-S, Pitch="2.54 mm", RoHS=True
P1 P2: library part CMP-1502-01064-1, "THT Vertical Pin Header WR-PHD, Pitch 2.54 mm, Single Row, 4 pins", Contact Resistance=20mOhm, Manufacturer="Wurth Elektronik", Operating Temperature=-40to105degC, Rated Current=3A, Withstanding Voltage=500VAC, Working Voltage=250VAC, Datasheet URL=https://katalog.we-online.de/em/datasheet/6130xx11121.pdf, Gender=Male, Manufacturer URL=http://www.we-online.de, Mounting Technology=THT, Orientation=Vertical, Package Reference=61300411121, Packaging=Bag, Part Number=61300411121, Pin Number=4, Pitch=2.54mm, Publisher=WurthElektronik, Row Number=Single
Q1 Q2: library part CMP-1048-00721-1, "General Purpose Transistor, NPN Silicon, 3-Pin SOT-23, Pb-Free, Tape and Reel", Manufacturer="On Semiconductor", ComponentLink1Description="Manufacturer URL", ComponentLink1URL=http://www.onsemi.com/, ComponentLink2Description=Datasheet, ComponentLink2URL=http://www.onsemi.cn/pub_link/Collateral/BC846ALT1-D.PDF, ComponentLink3Description="Package Specification", ComponentLink3URL=http://www.onsemi.cn/pub_link/Collateral/318-08.PDF, DatasheetVersion="Rev. 11", fT Min (MHz)=100, IC Continuous (A)=0.1, Mounting Technology="Surface Mount", PackageDescription="3-Pin Small Outline Transistor, Body 2.92 x 1.3 mm, Pitch 0.95 mm", PackageReference=SOT-23-3-318-08, PackageVersion="Rev. AP, 11/2009", Packing="Tape and Reel", PartNumber=BC848CLT1G, Polarity=NPN, RoHS=TRUE
R1: library part CMP-2000-04831-3, "RES 20KΩ 1.00% 0.1W 0603", Case Code (Imperial)=0603, Case Code (Metric)=1608, Max Operating Temperature=155°C, Max Power Dissipation=100mW, Min Operating Temperature=-55°C, Ratings=AEC-Q200, Resistance=20kR, Resistor Type="Thick Film", Temperature Coefficient=100ppm/°C, Tolerance=1%, Voltage Rating=50V, Case/Package=0603, Features="Moisture Resistant", Height=0.45mm, Lead Free="Lead Free", Length=1.6mm, Number of Terminations=2, Packaging="Tape and Reel", Power Rating=100mW, RoHS Compliant=Yes, Series=AC, Termination=SMD/SMT, Width=0.8mm
R2: library part CMP-2000-06937-1, "Chip Resistor, 2 KOhm, +/- 1%, 50 V, -55 to 155 degC, 0603 (1608 Metric), RoHS, Tape and Reel", Manufacturer=Yageo, Operating Temperature=-55°C~155°C, Package / Case=0603(1608Metric), Package Description="2-Pin Surface Mount Device, Body 1.6 x 0.8 mm", Package Reference=0603, Power (Watts)=0.1W,1/10W, Resistance (Ohms)=2k, Standard Package=1, Temperature Coefficient=±100ppm/°C, Tolerance=±1%, Catalog Drawings=ThickFilmResistorTopThickFilmResistorSide, Category=Resistors, Composition=ThickFilm, Datasheet URL=http://www.yageo.com/documents/recent/PYu-RC_Group_51_RoHS_L_7.pdf, Datasheet Version="Rev. 7, 05/2017", EDA / CAD Models=DownloadfromAcceleratedDesigns, Family=ChipResistor-SurfaceMount, Features=MoistureResistant, Height="0.022\"(0.55mm)", HTML Datasheet=RCSeries,LSuffixDatasheet.html, Kits=PHH4-KIT-ND-RESKIT1K-9.76K1/10W5700PCS, Manufacturer URL=http://www.yageo.com/, Mounting Technology=SurfaceMount, Number of Terminations=2, Online Catalog=RC0603Series, Other Names=311-2.00KHRCT, Packaging=CutTape(CT), PCN Other=RC/AC0603/0805/120622/Jan/2013, Product Training Modules=ChipResistor, Series=RC, Size / Dimension="0.063\"Lx0.031\"W(1.60mmx0.80mm)", Supplier Device Package=0603
R3 R9 R10 R11: library part CMP-1012-00623-3, "Chip Resistor, 10 KOhm, +/- 1%, 0.1 W, -55 to 155 degC, 0603 (1608 Metric), RoHS, Tape and Reel", Case Code (Imperial)=0603, Case Code (Metric)=1608, Manufacturer=Panasonic, Max Operating Temperature=155degC, Max Power Dissipation=100mW, Min Operating Temperature=-55degC, Package Description="2-Pin Surface Mount Device, Body 1.6 x 0.85 mm", Package Quantity=1, Package Reference=603, Resistance=10KOhm, Temperature Coefficient=100ppm\/degreesC, Tolerance=1%, Voltage Rating=75V, Case\/Package=0603, Composition=ThickFilm, Contact Plating=Tin, Datasheet URL=https://industrial.panasonic.com/cdbs/www-data/pdf/RDA0000/AOA0000C304.pdf, Datasheet Version=02/2017, Depth=0.8mm, Height=0.45mm, Lead Free=LeadFree, Length=1.6mm, Manufacturer URL=http://www.panasonic.com/, Military Standard=Not, Mount=SurfaceMount, Mounting Technology=SurfaceMount, Number of Pins=2, Number of Terminations=2, Packaging=TapeandReel, Power Rating=100mW, Radiation Hardening=No, REACH SVHC=NoSVHC, RoHSCompliant=true, Termination=SMD/SMT, Voltage Rating (DC)=75V, Width=0.031inch
R4: library part CMP-1012-00700-2, Manufacturer="Vishay Dale", Part Number=CRCW060347K5FKEA
R5: library part CMP-2002-07515-2, "RES 22.1K OHM 1% 1/16W 0402", Case Code (Imperial)=0402, Case Code (Metric)=1005, Max Operating Temperature=155°C, Max Power Dissipation=63mW, Min Operating Temperature=-55°C, Package Quantity=1, Power Rating=62.5mW, Resistance=22.1kR, Resistance Tolerance=1%, Resistor Type="Thick Film", Temperature Coefficient=100ppm/°C, Voltage Rating=50V, Case/Package=0402, Construction=Rectangular, Depth=0.5mm, Features="Moisture Resistant", Height=0.016inch, Lead Free="Lead Free", Length=0.039inch, Military Standard=Not, Number of Terminations=2, Packaging="Tape and Reel", REACH SVHC="No SVHC", RoHS Compliant=Yes, Series=RC, Technology="THICK FILM", Termination=SMD/SMT, Tolerance=1%, Voltage Rating (DC)=50V, Width=0.02inch, Working Voltage=50V
R6: library part CMP-2000-04828-3, "RES 1kΩ 1.00% 0.1W 0603", Case Code (Imperial)=0603, Case Code (Metric)=1608, Max Operating Temperature=155°C, Max Power Dissipation=100mW, Min Operating Temperature=-55°C, Package Quantity=1, Ratings=AEC-Q200, Resistance=1kR, Resistor Type="Thick Film", Temperature Coefficient=100ppm/°C, Tolerance=1%, Voltage Rating=50V, Case/Package=0603, Construction=Rectangular, Depth=0.8mm, Features="Moisture Resistant", Height=0.022inch, Lead Free="Lead Free", Length=0.063inch, Military Standard=Not, Number of Terminations=2, Packaging="Tape and Reel", Power Rating=100mW, RoHS Compliant=Yes, Series=AC, Size Code=0603, Termination=SMD/SMT, Width=0.031inch
R7 R8: library part CMP-2100-03667-1, "Chip Resistor, 0 Ohm, +/- 5%, 0.1 W, -55 to 155 degC, 0603 (1608 Metric), RoHS, Tape and Reel", Case Code (Imperial)=0603, Case Code (Metric)=1608, Manufacturer=Yageo, Max Operating Temperature=155degC, Min Operating Temperature=-55degC, Package Description="2-Pin Surface Mount Device, Body 1.6 x 0.8 mm", Package Quantity=5000, Power Rating=100mW, Resistance=0mOhm, Temperature Coefficient=200ppm/degreesC, Tolerance=5%, Voltage Rating=50V, Case/Package=0603, Composition=ThickFilm, Contact Plating=Tin, Datasheet URL=http://www.yageo.com/NewPortal/yageodocoutput?fileName=/pdf/R-Chip/PYu-RC_Group_51_RoHS_L_5.pdf, Datasheet Version="Rev. 5, 10/2016", Depth=0.8mm, Height=0.45mm, Lead Free=LeadFree, Length=1.6mm, Manufacturer URL=http://www.yageo.com/, Military Standard=Not, Number of Pins=2, Package Reference=0603, Packaging=TapeandReel, Radiation Hardening=No, REACH SVHC=NoSVHC, RoHSCompliant=true, Termination=SMD/SMT, Voltage Rating (DC)=50V, Width=0.8mm
R12: library part CMP-07231-005130-1, "Thick Film Chip Resistors 1206 5.1kΩ 0.25W 1% 100ppm/°C", Case Code (Imperial)=1206, Case Code (Metric)=3216, Max Operating Temperature=155°C, Max Power Dissipation=250mW, Min Operating Temperature=-55°C, Package Quantity=1, Resistance=5.1kR, Temperature Coefficient=100ppm/°C, Tolerance=1%, Voltage Rating=200V, Case/Package=1206, Composition="Thick Film", Contact Plating=Tin, Depth=1.6mm, Features="Moisture Resistant", Height=0.03inch, Length=3.2mm, Military Standard=Not, Mount="Surface Mount", Number of Terminations=2, Packaging="Tape and Reel", Power Rating=250mW, Radiation Hardening=No, Termination=SMD/SMT, Thickness=610um, Width=0.063inch
SW1 SW2: library part CMP-10040-000011-1, "SWITCH TACTILE SPST-NO 0.05A 16V", Contact Resistance=500mΩ, Current Rating=50mA, Manufacturer="C&K Components", Operating Force=400gf, Temperature="-40°C to +85°C", Temperature Range High=+85°C, Temperature Range Low=-40°C, Voltage Rating Dc=16V, Automotive=No, Category=Switch, ComponentLink2Description=Datasheet, ComponentLink2URL=https://www.ckswitches.com/media/1476/pts810.pdf, Device Class L1=Electromechanical, Device Class L2=Switches, Device Class L3="Tactile Switches", Digikey Description="SWITCH TACTILE SPST-NO 0.05A 16V", Electromechanical Life=100000Cycles, Height=2.7mm, Lead Free=Yes, Manufacturer Part Number="PTS810 SJG 250 SMTR LFS", Mouser Description="Switch Tactile N.O. SPST Button J-Bend 0.05A 16VDC 100000Cycles 3.92N SMD T/R", Octopart=https://octopart.com/pts810sjg250smtrlfs-c%26k+components-29380277, Package="PTS810 SJG 250 SMTR LFS", RoHS=TRUE, Throw Configuration=SPST-NO
U1: "WiFi Modules - 802.11 SMD module, ESP32-S2R2 with 2 MB PSRAM inside, 4 MB SPI flash, PCB antenna/002", Manufacturer_Name="Espressif Systems", Mouser Part Number=356-ESP32-S2SOLON4R2, Datasheet Link=https://www.espressif.com/sites/default/files/documentation/esp32-s2-solo_esp32-s2-solo-u_datasheet_en.pdf, Geometry.Height=3.25mm, Manufacturer_Part_Number=ESP32-S2-SOLO-N4R2, Mouser Price/Stock=https://www.mouser.co.uk/ProductDetail/Espressif-Systems/ESP32-S2-SOLO-N4R2?qs=pBJMDPsKWf0j4qPDQHWJuA%3D%3D
U2: library part CMP-2000-07408-2, "IC FLASH 8MBIT SPI 104MHZ 8SOIC", Case/Package=SOIC, Frequency=104MHz, Max Operating Temperature=85°C, Min Operating Temperature=-40°C, Interface=SPI, Memory Size=8Mb, Memory Type=Non-Volatile, Mount="Surface Mount", Packaging=Rail/Tube, RoHS Compliant=Yes, Series=SpiFlash®
U3: library part CMP-0326-00056-3, "ESD Solution for High-Speed Differential Interface, 4 Channels, -40 to +85 degC, 6-pin SOT-32 (DBV), Green (RoHS & no Sb/Br)", Breakdown Voltage(Min)(V)=9, Differential Capacitance(pF)=0.05, IO Capacitance(Typ)(pF)=0.8, IO Leakage Current(nA)=10, Manufacturer="Texas Instruments", ComponentLink1Description="Manufacturer URL", ComponentLink1URL=http://www.ti.com/, ComponentLink2Description=Datasheet, ComponentLink2URL=http://www.ti.com/general/docs/lit/getliterature.tsp?genericPartNumber=TPD4S009&fileType=pdf, ComponentLink3Description="URL Link1", ComponentLink3URL=SamplesURL:http://www.ti.com/product/tpd4s009#samples, DatasheetVersion=SLVS817E, Eco-Plan="Green (RoHS & no Sb/Br)", IEC 61000-4-2 Air-Gap(+/- kV)=9, IEC 61000-4-2 Contact(+/- kV)=8, Mounting Technology="Surface Mount", PackageDescription="6-Pin Plastic Small-Outline Package, 2.9 x 1.6 mm Body, 0.95 mm Pitch, 2.8 mm Lead Span", PackageReference=DBV0006A, PackageVersion="revK, Mar-2006", PartNumber=TPD4S009DBVR, SubFamily="ESD Solution"
U4: library part CMP-08093-000005-1, "IC USB TO UART BRIDGE QFN28"

## Via types
v1: diameter 0.91, hole 0.4, Top Layer to Bottom Layer, tented both sides, 71 vias

## Nets (pads, with @x,y where several pads share a name; then routed paths per layer and width w, separated by ;. In a path a pad name is that pad's centre, name@x,y a point inside that pad or via, vN(x,y) a via of type N, cw(c..) or ccw(c..) an arc to the next point about the centre after c; other vN are vias at no path point)
ADC2_CH6: J2.3 U1.10 | length 35.7
  Top Layer w0.381: v1(15.799,30.734) 15.799,33.151 16.022,33.374 U1.10
  Bottom Layer w0.508: J2.3 7.671,7.874 16.231,16.434 16.231,28.365 15.799,28.796 v1(15.799,30.734)
FSPICLK: U1.20 U2.6 | length 7.3
  Top Layer w0.381: U2.6 25.654,22.225 25.884,22.455 U1.20@25.884,27.425
FSPICSO: U1.18 U2.1 | length 14.3
  Top Layer w0.381: U1.18 23.356,27.032 23.356,25.539 v1(23.368,25.527) ; v1(25.4,19.685) U2.1
  Bottom Layer w0.381: v1(23.368,25.527) 24.562,24.333 24.562,20.523 v1(25.4,19.685)
FSPID: U1.19 U2.5 | length 4.2
  Top Layer w0.381: U2.5 23.609,23.965 23.774,24.13 24.13,24.13 24.626,24.626 24.626,27.032 U1.19
FSPIHD: U1.17 U2.7 | length 8.3
  Top Layer w0.381: U1.17@21.868,27.219 U1.17@22.074,27.425 ; U1.17 22.074,25.934 21.666,25.527 21.666,21.229 21.889,21.006 23.558,21.006 U2.7
FSPIQ: U1.21 U2.2 | length 10.7
  Top Layer w0.381: U1.21 U1.21@27.178,27.02 ; U1.21@27.178,27.401 27.178,21.178 27.401,20.955 U2.2
FSPIWP: U1.22 U2.3 | length 11.5
  Top Layer w0.381: U1.22 28.424,25.496 28.647,25.273 33.305,25.273 33.528,25.05 33.528,22.606 33.147,22.225 U2.3
GND: B1.2 C1.2 C2.2 C3.2 C4.2 C5.2 C6.2 C7.1 C8.1 DS1.2 J1.5 J2.5 P2.4 R3.1 R4.1 R9.2 SW2.2 SW2.4 U1.1 U1.40 U1.41 U1.42 U1.43 U1.44 U1.45 U1.46 U1.47 U1.48 U1.49 U2.4 U3.2 U4.3 U4.29 | length 1.4
  Top Layer w0.254: U4.3@10.922,22.606 U4.3 ; C7.1@13.027,32.345 C7.1
  Top Layer w0.508: U1.44 U1.41
  other v1: 9.144,3.937 43.409,5.131 21.336,5.969 31.242,6.248 43.815,12.192 6.756,15.443 41.58,18.212 10.425,20.209 28.804,23.419 14.762,23.597 25.527,29.337 30.679,29.873 21.717,29.972 28.702,32.512 24.13,32.639 41.91,33.147 20.193,33.782 30.607,35.814 1.524,36.627 19.939,38.354 31.115,40.132 25.019,40.767 30.988,43.053 21.336,43.18 26.543,43.18 38.405,45.085 7.493,45.136 11.176,45.136 2.286,45.212
GPIO15: J2.1 U1.8 | length 50
  Top Layer w0.381: v1@15.867,35.915 U1.8@17.768,35.915
  Bottom Layer w0.445: J2.1@2.794,2.794 1.067,4.521 1.067,33.68 4.724,37.338 11.379,37.338 12.767,35.95 v1(15.469,35.95)
GPIO16: J2.2 U1.9 | length 41.3
  Top Layer w0.381: v1(14.072,34.544) 14.122,34.594 17.719,34.594 U1.9
  Top Layer w0.508: J2.2 3,4.925 3.48,4.445 5.976,4.445 6.274,4.743 v1(6.274,9.296)
  Bottom Layer w0.508: v1(6.274,9.296) 6.351,9.373 7.316,9.373 13.183,15.24 13.183,32.433 14.072,33.322 v1(14.072,34.544)
MTCK: P1.1 U1.32 | length 18.5
  Top Layer w0.381: U1.32 36.383,34.644 36.576,34.451 36.576,22.799 36.769,22.606 P1.1
MTDI: P1.3 U1.34 | length 14.9
  Top Layer w0.381: U1.34 37.619,37.184 38.964,35.839 38.964,28.626 39.903,27.686 P1.3
MTDO: P1.2 U1.33 | length 16.8
  Top Layer w0.381: U1.33 36.857,35.914 37.846,34.925 37.846,25.339 38.039,25.146 P1.2
MTMS: P1.4 U1.35 | length 13.7
  Top Layer w0.381: U1.35 38.508,38.454 40.132,36.83 40.132,30.734 40.64,30.226 P1.4
NetC5_1: C5.1 Q1.3 R2.1 U1.3 | length 42.3
  Top Layer w0.457: v1(12.268,34.341) 12.268,35.465 12.536,35.733 C5.1 12.536,38.774 12.929,39.167 14.479,39.167 15.001,39.689 R2.1 ; R2.1@15.025,40.704 15.812,40.704 16.129,41.021 16.129,41.744 16.649,42.264 U1.3
  Top Layer w0.508: v1(11.328,16.027) 11.405,15.95 12.348,15.95 12.827,15.471 12.827,9.296 12.192,8.661 Q1.3
  Bottom Layer w0.475: v1(11.328,16.027) 11.412,16.111 11.412,16.232 11.887,16.707 11.887,33.851 12.268,34.232 v1(12.268,34.341)
NetC7_2: C7.2 R4.2 R5.2 U4.8 | length 20.4
  Top Layer w0.254: v1(6.35,22.098) 6.528,22.098 6.913,21.712 8.024,21.712 U4.8@8.027,21.709 ; v1(8.915,31.826) 9.768,30.974 R4.2@10.541,30.974 ; R4.2@10.636,30.974 C7.2
  Top Layer w0.508: R5.2 8.585,33.147 8.915,32.817 v1(8.915,31.826)
  Bottom Layer w0.508: v1(6.35,22.098) 6.427,22.175 6.427,22.835 8.865,25.273 8.865,31.775 v1(8.915,31.826)
NetDS1_1: DS1.1 R12.1 | length 3.4
  Top Layer w0.508: R12.1 10.363,14.889 11.3,13.952 DS1.1 11.2,13.525 DS1.1@11.154,13.571
NetJ1_2: J1.2 U3.4 | length 44.5
  Top Layer w0.432: U3.4@3.652,30.771 2.273,30.771 1.93,30.429 1.93,26.797 2.769,25.959 15.672,25.959 17.821,23.81 19.111,23.81 v1(19.202,23.901)
  Top Layer w0.508: v1(19.304,17.932) 19.227,17.855 19.227,17.551 18.923,17.247 18.923,12.769 19.221,12.471 25.146,12.471 25.621,11.996 25.621,10.071 25.62,10.07 J1.2@25.62,9.916
  Bottom Layer w0.508: v1(19.202,23.901) 19.253,23.851 19.253,17.983 v1(19.304,17.932)
NetJ1_3: J1.3 U3.3 | length 38.5
  Top Layer w0.508: U3.3 7.604,30.75 8.966,29.388 14.021,29.388 17.085,26.324 17.77,26.324 v1(17.78,26.314) ; v1(20.523,16.485) 20.495,16.456 20.495,14.014 20.792,13.716 26.118,13.716 26.416,13.418 J1.3
  Bottom Layer w0.508: v1(17.78,26.314) 17.857,26.237 19.305,26.237 20.726,24.816 20.726,16.797 20.523,16.593 v1(20.523,16.485)
NetQ1_1: Q1.1 R10.2 | length 5.6
  Top Layer w0.508: R10.2 Q1.1
NetQ1_2: Q1.2 R11.1 U4.24 | length 42.4
  Top Layer w0.3: U4.24@12.827,19.709 14.393,19.709 14.717,19.385 14.717,18.734 v1(14.732,18.72)
  Top Layer w0.508: Q1.2 14.081,8.112 14.351,8.382 14.351,16.18 14.732,16.561 v1(14.732,18.72) ; v1(39.497,10.287) R11.1
  Bottom Layer w0.508: v1(14.326,8.915) 15.519,8.915 16.993,7.442 20.523,7.442 22.225,9.144 38.354,9.144 v1(39.497,10.287)
NetQ2_1: Q2.1 R11.2 | length 2.2
  Top Layer w0.254: Q2.1@41.717,8.096 Q2.1
  Top Layer w0.508: R11.2 41.686,8.143 Q2.1
NetQ2_2: Q2.2 R10.1 U4.28 | length 60.3
  Top Layer w0.254: U4.28@12.827,21.709 16.284,21.709 16.944,22.369 17.772,22.369 v1(17.78,22.377)
  Top Layer w0.508: R10.1 12.542,1.441 12.84,1.143 18.671,1.143 19.812,2.284 19.812,8.865 v1(19.736,8.941) 18.212,8.941 17.297,9.855 17.297,14.195 17.653,14.551 v1(17.653,18.567) ; v1(37.414,11.151) 37.414,9.222 38.525,8.112 Q2.2
  Bottom Layer w0.508: v1(17.653,18.567) 17.716,18.631 17.716,22.314 v1(17.78,22.377) ; v1(19.736,8.941) 20.549,9.754 20.549,10.65 20.846,10.947 35.484,10.947 35.687,11.151 v1(37.414,11.151)
NetQ2_3: Q2.3 R9.1 SW1.1 SW1.3 U1.27 | length 43.7
  Top Layer w0.508: v1(33.655,12.573) 32.944,11.862 32.944,4.013 34.257,2.7 SW1.1 R9.1@40.744,2.7 ; U1.27 35.269,20.364 35.567,20.066 v1(40.127,20.066) ; R9.1@40.752,2.642 40.752,6.081 Q2.3@40.767,6.096
  Bottom Layer w0.508: v1(33.655,12.573) 40.05,18.968 40.05,19.989 v1(40.127,20.066)
NetR1_1: R1.1 R2.2 SW2.1 SW2.3 | length 52.3
  Top Layer w0.508: v1(11.659,40.538) 11.736,40.615 13.655,40.615 R2.2@13.655,40.64 ; R2.2 13.701,42.235 13.999,42.533 14.808,42.533 R1.1@14.859,42.584 ; SW2.3@15.053,6.648 15.054,6.647 SW2.1@17.145,6.647 ; v1(15.824,12.954) 15.824,9.322 17.306,7.84 SW2.1
  Bottom Layer w0.508: v1(11.659,40.538) 11.666,40.538 12.326,39.878 15.748,39.878 17.297,38.329 17.297,30.632 21.946,25.984 21.946,15.342 20.625,14.021 16.99,14.021 15.923,12.954 v1(15.824,12.954)
NetR3_2: R3.2 U4.11 | length 4.8
  Top Layer w0.292: R3.2 5.804,17.863 5.975,18.034 6.957,18.034 7.128,18.205 7.128,20.133 7.204,20.209 U4.11@7.702,20.209
NetR6_2: R6.2 U4.9 | length 3.4
  Top Layer w0.292: R6.2@5.822,19.5 5.822,20.339 5.994,20.51 6.712,20.51 7.411,21.209 U4.9
NetU3_1: U3.1 U4.4 | length 9.9
  Top Layer w0.292: U4.4 10.425,24.522 v1(10.439,24.536)
  Top Layer w0.508: U3.1@6.247,28.829 6.226,28.85 U3.1 6.101,28.485 6.545,28.042 10.026,28.042 v1(10.407,27.661)
  Bottom Layer w0.508: v1(10.407,27.661) 10.423,27.644 10.423,24.553 v1(10.439,24.536)
NetU3_6: U3.6 U4.5 | length 13.7
  Top Layer w0.292: v1@3.747,24.448 3.747,24.493 3.943,24.689 8.458,24.689 9.925,23.222 U4.5
  Top Layer w0.508: U3.6 3.551,27.613 3.849,27.315 4.728,27.315 4.819,27.407 v1(4.928,27.407)
  Bottom Layer w0.508: v1(3.658,24.58) 3.658,25.248 4.928,26.518 v1(4.928,27.407)
U0RXD_MCU: P2.2 R7.1 R7.2 U1.36 U4.25 | length 59
  Top Layer w0.254: R7.1 R7.2 28.042,15.265 29.667,13.64 v1(31.877,13.64)
  Top Layer w0.279: U4.25@13.102,20.209 18.932,20.209 23.876,15.265 R7.1
  Top Layer w0.381: U1.36 35.321,39.776 39.166,39.776 v1(39.218,39.827) 39.218,39.776 40.513,38.481 P2.2 P2.2@42.5,38.481
  Bottom Layer w0.508: v1(31.877,13.64) 31.912,13.675 32.547,13.675 38.583,19.71 38.583,39.192 v1(39.218,39.827)
U0TXD_MCU: P2.3 R8.1 R8.2 U1.37 U4.26 | length 56.1
  Top Layer w0.254: R8.1@29.178,16.307 R8.1@29.203,16.281 ; R8.1@29.203,16.688 R8.2 ; R8.2@30.57,16.713 v1@32.918,16.713 ; v1@32.741,16.739 v1(32.918,16.739)
  Top Layer w0.279: U4.26@12.827,20.709 19.906,20.709 23.901,16.713 R8.1@29.178,16.713
  Top Layer w0.381: U1.37 35.282,41.007 36.591,41.007 37.211,41.628 v1(37.211,41.732) 37.287,41.808 39.802,41.808 40.589,41.021 P2.3
  Bottom Layer w0.508: v1(32.918,16.739) 32.918,19.2 32.918,19.408 33.064,19.556 36.703,23.258 37.211,23.766 v1(37.211,41.732)
VBUS: D1.2 J1.1 R5.1 U3.5 | length 58.6
  Top Layer w0.508: D1.2 3.429,33.445 3.727,33.147 R5.1 5.77,33.122 5.77,32.516 4.572,31.318 4.572,30.082 4.274,29.784 3.697,29.784 U3.5@3.697,29.779 ; v1(6.299,10.922) 7.036,10.922 9.525,8.433 v1@9.525,7.375 ; v1(18.898,10.668) 19.431,11.201 24.518,11.201 24.816,10.904 J1.1
  Bottom Layer w0.445: v1(3.578,33.296) 3.578,32.183 2.261,30.865 2.261,17.805 6.299,13.767 v1(6.299,10.922)
  Bottom Layer w0.508: v1(9.497,7.375) 10.347,7.375 13.64,10.668 v1(18.898,10.668)
VDD33: B1.4 B1.5 C3.1 C4.1 C8.2 J2.4 P2.1 R1.2 R6.1 R12.2 SW1.2 SW1.4 U1.2 U2.8 U4.6 U4.7 | length 167.8
  Top Layer w0.3: U4.7@8.927,22.609 U4.6
  Top Layer w0.36: C3.1@9.876,43.484 C4.1 13.004,43.484 13.804,44.284 R1.2
  Top Layer w0.483: v1(7.493,35.154) 7.575,35.072 10.358,35.072 10.795,35.509 10.795,39.243 10.16,39.878 7.615,39.878 B1.4 B1.5 8.382,43.495 C3.1 ; R1.2 15.914,44.284 16.664,43.534 U1.2 ; U2.8 23.609,18.972 24.395,18.186 35.154,18.186 36.957,16.383 ; v1(35.433,4.775) 35.44,4.783 35.44,6.803 SW1.2@35.437,6.806 ; SW1.2 35.448,14.874 36.957,16.383 ; SW1.2@35.45,6.853 SW1.4@37.595,6.853 ; v1(41.199,16.383) 36.957,16.383
  Top Layer w0.508: J2.4 4.064,10.414 4.826,11.176 ; v1(4.826,6.248) 4.826,11.176 ; R12.2@8.809,12.116 R12.2 ; R12.2@8.811,12.041 7.72,12.041 6.045,13.716 4.826,13.716 ; U4.7@8.927,22.609 U4.7 7.988,23.546 4.901,23.546 3.988,22.633 3.454,22.633 C8.2 3.427,22.454 3.427,21.541 3.683,21.285 v1(4.75,21.285) 4.75,21.176 4.104,20.53 R6.1 3.092,19.5 2.794,19.202 2.794,15.436 3.092,15.138 4.528,15.138 4.826,14.841 4.826,13.716 ; 4.826,11.176 4.826,13.716
  Bottom Layer w0.483: v1(41.199,16.383) 43.307,16.383 43.815,16.891 43.815,35.384 43.258,35.941 P2.1@42.5,35.941
  Bottom Layer w0.508: v1(4.75,21.285) 4.75,23.292 7.493,26.035 v1(7.493,35.154) ; v1(4.826,6.248) 4.826,1.651 5.207,1.27 31.928,1.27 v1(35.433,4.775)
VIN: B1.1 B1.3 C1.1 C2.1 C6.1 D1.1 | length 20.8
  Top Layer w0.508: B1.3 5.115,40.732 6.207,39.64 6.207,38.177 3.511,38.177 D1.1 3.384,38.14 1.415,38.14 1.118,38.437 1.118,43.197 1.415,43.495 B1.1 ; C1.1 C6.1
pads on no net: J1.4 J1.Shell U1.4 U1.5 U1.6 U1.7 U1.11 U1.12 U1.13 U1.14 U1.15 U1.16 U1.23 U1.24 U1.25 U1.26 U1.28 U1.29 U1.30 U1.31 U1.38 U1.39 U4.1 U4.2 U4.10 U4.12 U4.13 U4.14 U4.15 U4.16 U4.17 U4.18 U4.19 U4.20 U4.21 U4.22 U4.23 U4.27

## Polygon pours and split planes (outlines as drawn)
GND on Bottom Layer "GND_L02_P001" (hatched Horizontal grid 0.305 track 0.305, pour order 1): 0,0 0,46.736 19.38,46.736 19.38,44.298 33.655,44.298 33.655,46.736 36.652,46.736 36.678,46.711 36.703,46.736 45.212,46.736 45.212,0.025 45.187,0
GND on Top Layer "GND_L01_P000" (hatched Horizontal grid 0.305 track 0.305, pour order 0): 0,0 0,46.736 19.38,46.736 19.38,44.298 33.655,44.298 33.655,46.736 45.212,46.736 45.212,0.025

## Keep-outs
Keep-Out Layer:
  lines w0.254: 45.212,0.025 0,0.025 0,46.736 0.508,46.736 45.212,46.736 45.212,0.127

## Silkscreen, mask and mechanical layers (free items; w line width, h text height)
Top Overlay:
  text "GND" at 37.973,43.18 h0.74
  text "TXD" at 37.846,40.767 h0.74
  text "RXD" at 37.973,38.227 h0.74
  text "3V3" at 37.973,35.56 h0.74
  text "MTMS" at 37.211,29.972 h0.74
  text "MTDI" at 37.465,27.305 h0.74
  text "MTDO" at 37.211,24.765 h0.74
  text "MTCK" at 37.211,22.225 h0.74
  text "GND" at 4.953,12.573 h0.74
  text "3V3" at 4.953,10.16 h0.74
  text "ADC_CH" at 4.953,7.617 h0.74
  text "GPIO #1" at 4.953,5.08 h0.74
  text "EN" at 19.245,4.107 h0.74 r90
  text "BOOT" at 34.036,3.175 h0.74 r90
  text "GPIO #2" at 4.953,2.413 h0.74
Bottom Overlay:
  text "VitaRhythm" at 44.475,2.67 h1
  text "UNAL 2023-1" at 44.501,0.787 h1